# Altium PCB Levitador Magnetico.PcbDoc
Units mil, origin at the board's own origin, x right, y up, seen from the top; angles counter-clockwise.
Board outline 5905.51 x 5905.51 mil, 2 copper layers (Top Layer, Bottom Layer); 227 components, 115 nets, 620 pads, 44 vias.
Unrouted connection lines stored in the file: 297.
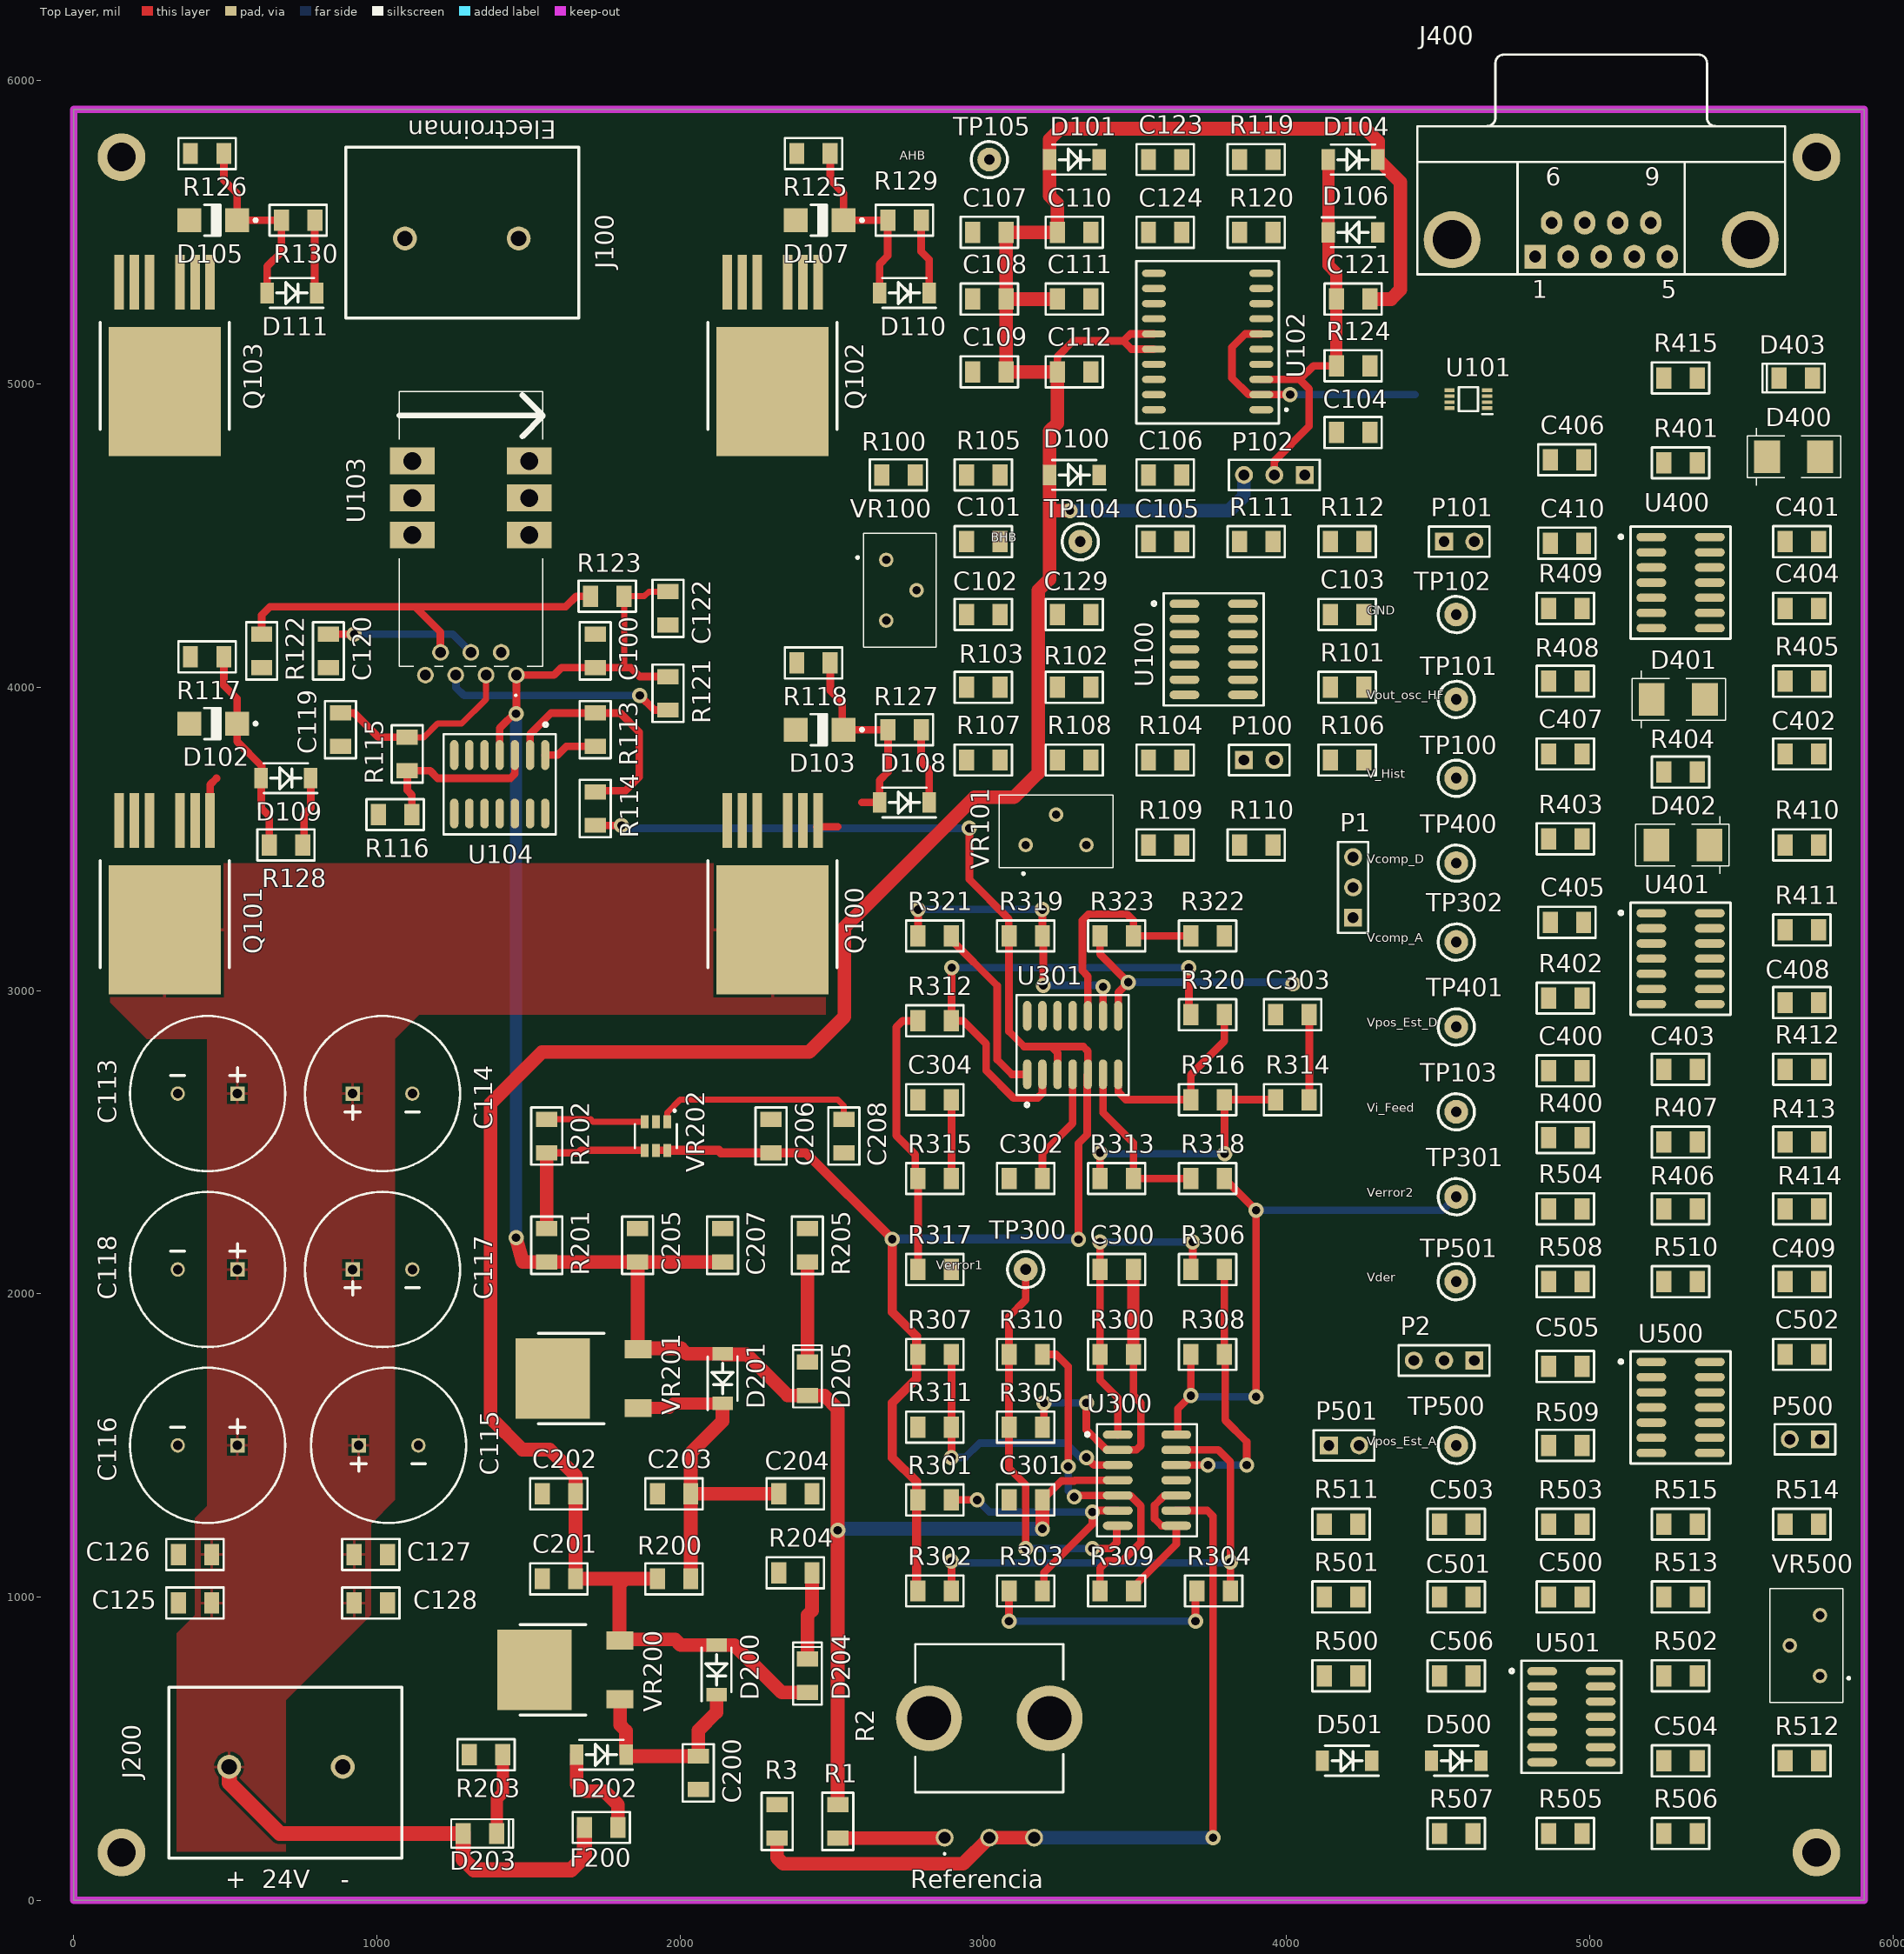
[diagram p0: Top Layer view]
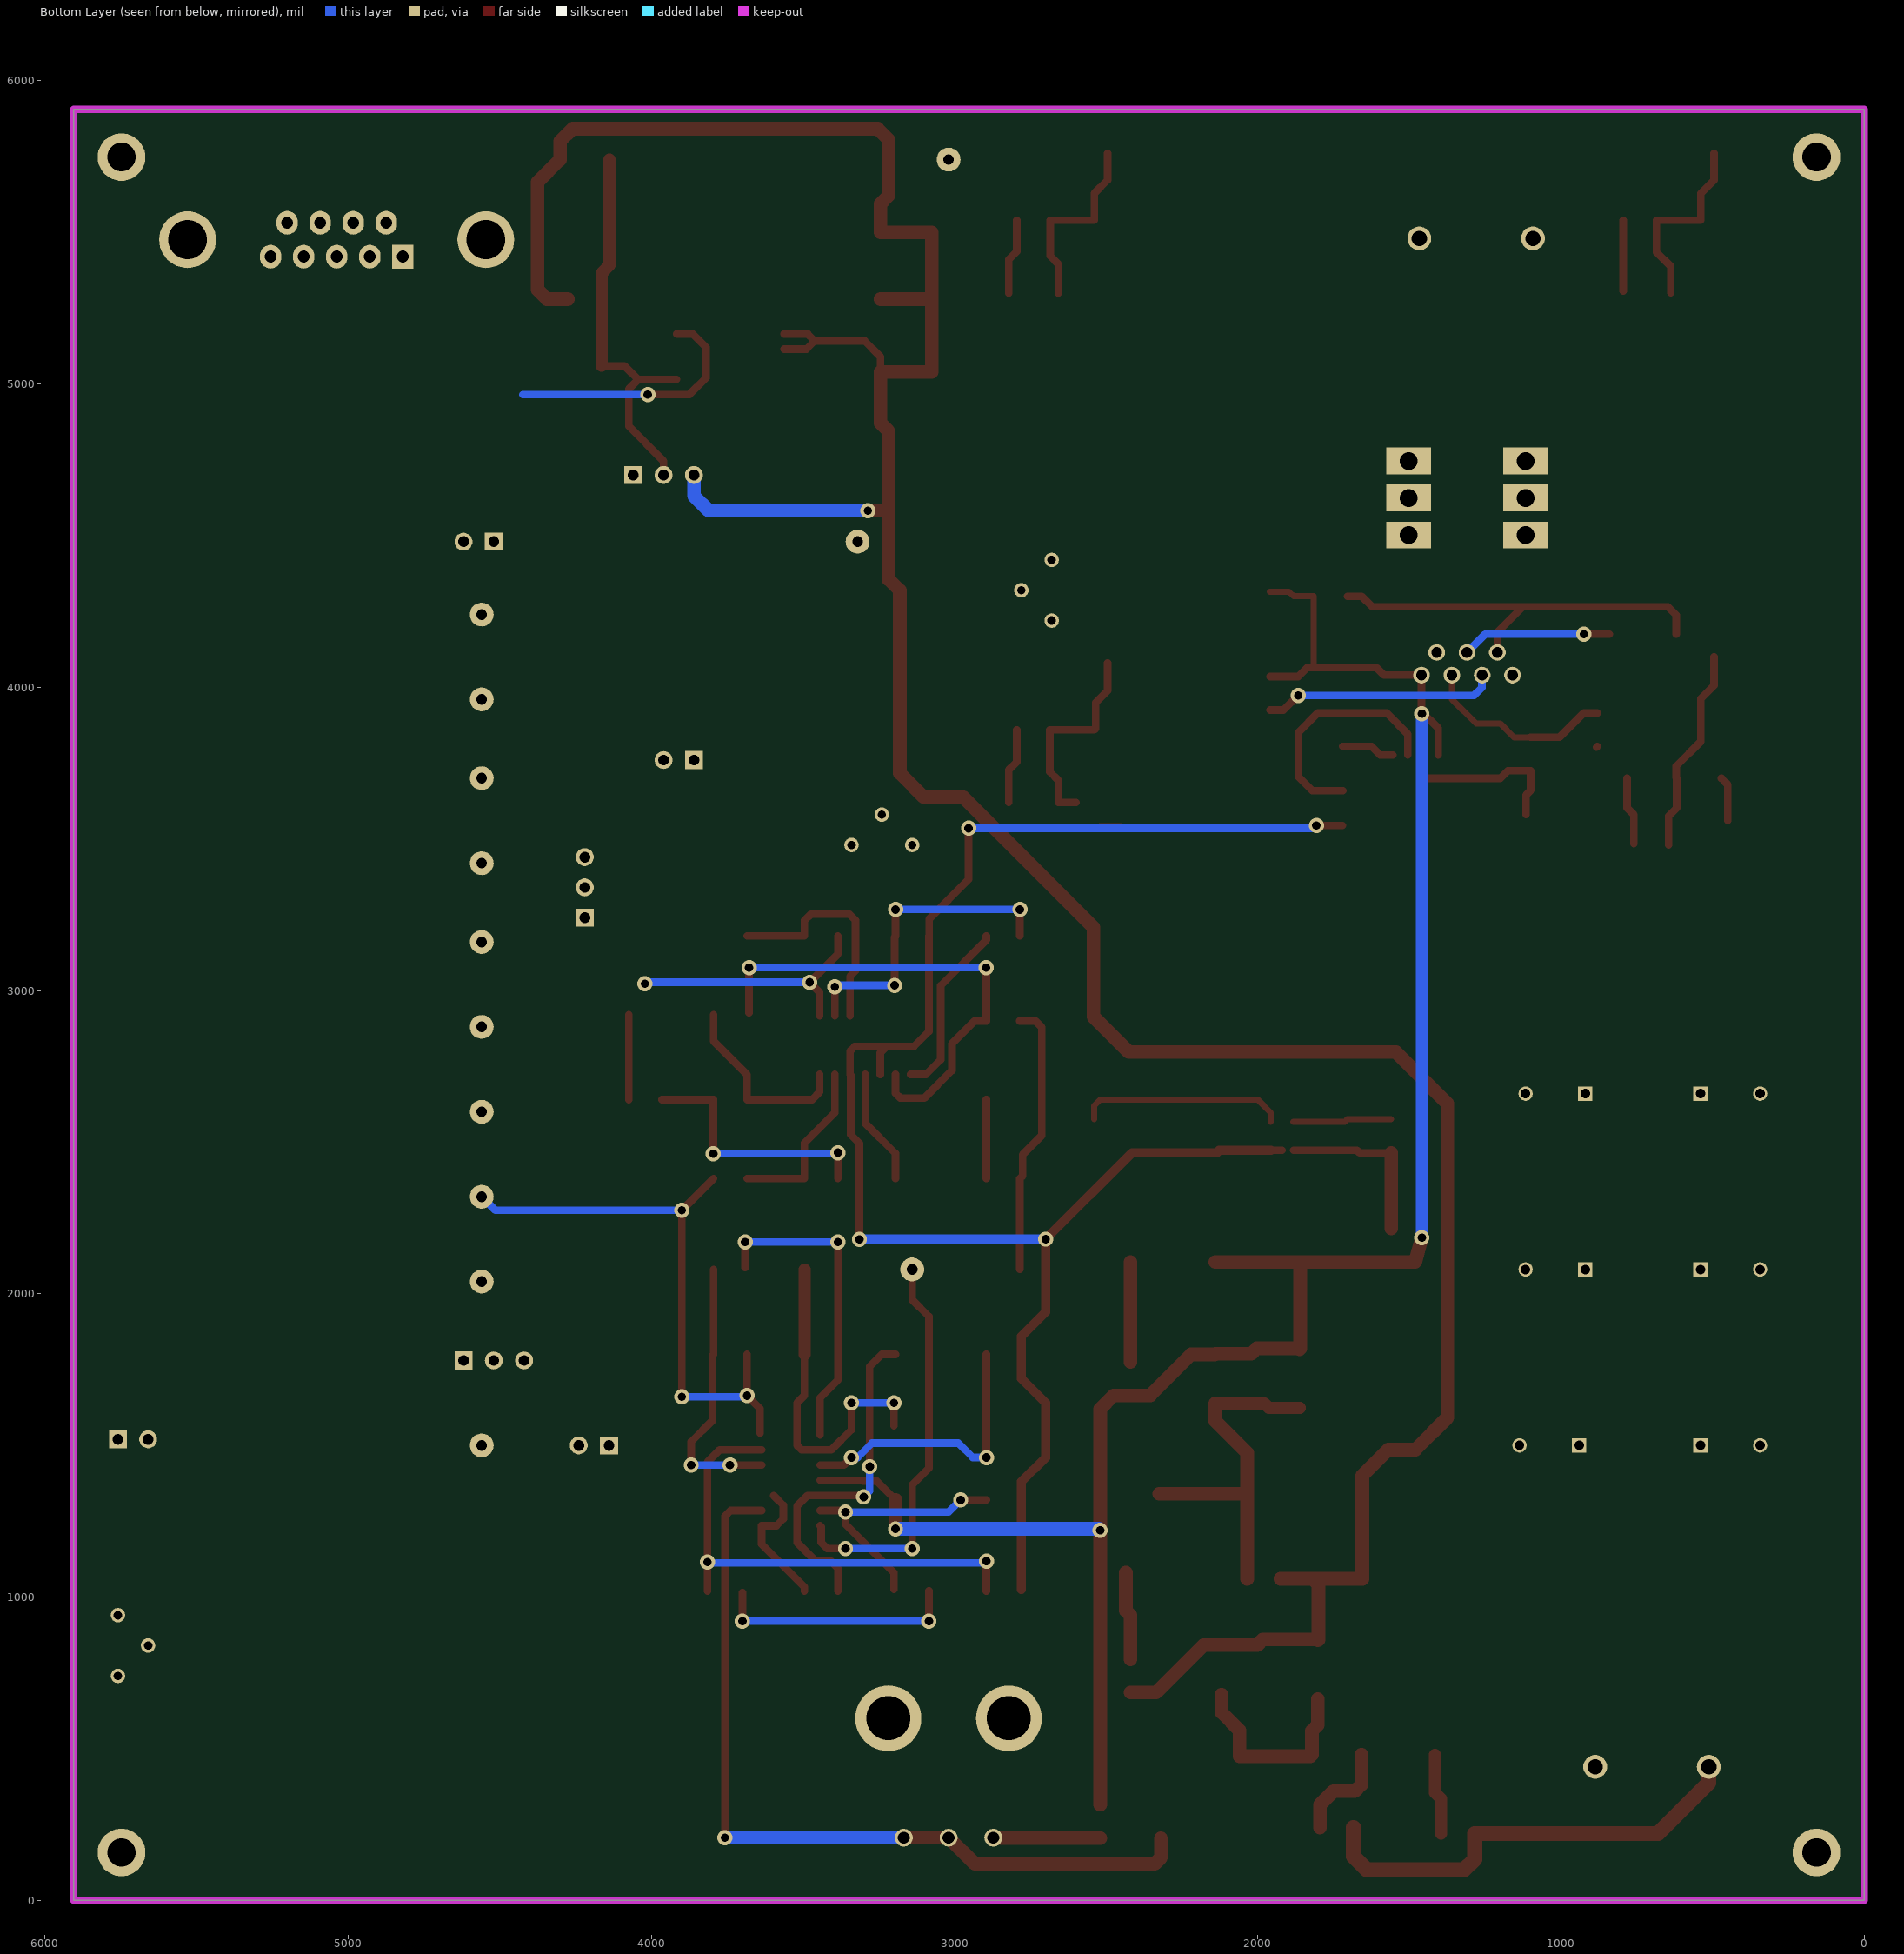
[diagram p1: Bottom Layer view, seen from below]

## Layer stack, top to bottom
Top Solder: solder mask 0.4, Solder Resist, Dk 3.5
Top Layer: signal copper 1.4
Dielectric 1: dielectric 12.6, FR-4, Dk 4.8
Bottom Layer: signal copper 1.4
Bottom Solder: solder mask 0.4, Solder Resist, Dk 3.5

## Board outline
0,0 5905.51,0 5905.51,5905.51 0,5905.51

## Design rules (kind name [scope] priority, off if disabled: settings)
Clearance [All] p1: gap=10
PolygonConnect [All] p1: connectstyle=Relief reliefconductorwidth=10 reliefentries=4 polygonreliefangle="90 Angle" airgapwidth=10
RoutingVias [All] p1: holewidth=28 width=50 viastyle="Through Hole" minholewidth=28 minwidth=50 maxholewidth=28 maxwidth=50
SolderMaskExpansion [All] p1: expansion=4
Width [All] p1: maxlimit=200 minlimit=10 preferedwidth=10
30 further rules are at their usual default settings.

## Classes and differential pairs
component class U_Signals2uC: C400 C401 C402 C403 C404 C405 C406 C407 C408 C409 C410 D400 D401 D402 D403 J400 R400 R401 R402 R403 R404 R405 R406 R407 R408 R409 R410 R411 R412 R413 R414 R415 TP400 TP401 U400 U401
component class "U_Puente H": C100 C113 C114 C115 C116 C117 C118 C119 C120 C122 C125 C126 C127 C128 D102 D103 D105 D107 D108 D109 D110 D111 J100 Q100 Q101 Q102 Q103 R113 R114 R115 R116 R117 R118 R121 R122 R123 R125 R126 R127 R128 R129 R130 U103 U104
component class U_Fuentes: C200 C201 C202 C203 C204 C205 C206 C207 C208 D200 D201 D202 D203 D204 D205 F200 J200 R200 R201 R202 R203 R204 R205 VR200 VR201 VR202
component class U_Estimador: C500 C501 C502 C503 C504 C505 C506 D500 D501 P500 P501 R500 R501 R502 R503 R504 R505 R506 R507 R508 R509 R510 R511 R512 R513 R514 R515 TP500 TP501 U500 U501 VR500
component class "U_Controlador de corriente  V3": C101 C102 C103 C104 C105 C106 C107 C108 C109 C110 C111 C112 C121 C123 C124 C129 D100 D101 D104 D106 P100 P101 P102 R100 R101 R102 R103 R104 R105 R106 R107 R108 R109 R110 R111 R112 R119 R120 R124 TP100 TP101 TP102 TP103 TP104 TP105 U100 U101 U102 VR100 VR101
component class U_Compensador: C300 C301 C302 C303 C304 R300 R301 R302 R303 R304 R305 R306 R307 R308 R309 R310 R311 R312 R313 R314 R315 R316 R317 R318 R319 R320 R321 R322 R323 TP300 TP301 TP302 U300 U301
component class Principal: P1 P2 R1 R2 R3

## Components (designator, comment, footprint, x,y, rotation, side; value= is the part's Value field where it differs from the comment)
C100 "Capacitor" C1206 1720,4120 r90 top
C101 "Capacitor" C1206 3000,4480 r180 top
C102 "Capacitor" C1206 3000,4240 r180 top
C103 "Capacitor" C1206 4200,4240 r180 top
C104 "Capacitor" C1206 4220,4840 r0 top
C105 "Capacitor" C1206 3600,4480 r0 top
C106 "Capacitor" C1206 3600,4700 r0 top
C107 "Capacitor" C1206 3020,5500 r0 top
C108 "Capacitor" C1206 3020,5280 r0 top
C109 "Capacitor" C1206 3020,5040 r0 top
C110 "Capacitor" C1206 3300,5500 r180 top
C111 "Capacitor" C1206 3300,5280 r180 top
C112 "Capacitor" C1206 3300,5040 r180 top
C113 "EKY-350ELL102MK25S" CAPPRD500W60D1300H2650 540,2660 r180 top
C114 "EKY-350ELL102MK25S" CAPPRD500W60D1300H2650 920,2660 r0 top
C115 "EKY-350ELL102MK25S" CAPPRD500W60D1300H2650 940,1500 r0 top
C116 "EKY-350ELL102MK25S" CAPPRD500W60D1300H2650 540,1500 r180 top
C117 "EKY-350ELL102MK25S" CAPPRD500W60D1300H2650 920,2080 r0 top
C118 "EKY-350ELL102MK25S" CAPPRD500W60D1300H2650 540,2080 r180 top
C119 "Capacitor" C1206 880,3860 r90 top
C120 "Capacitor" C1206 840,4120 r270 top
C121 "Capacitor" C1206 4220,5280 r0 top
C122 "Capacitor" C1206 1960,4260 r90 top
C123 "Capacitor" C1206 3600,5740 r0 top
C124 "Capacitor" C1206 3600,5500 r0 top
C125 "Capacitor" C1206 400,980 r0 top
C126 "Capacitor" C1206 400,1140 r0 top
C127 "Capacitor" C1206 980,1140 r180 top
C128 "Capacitor" C1206 980,980 r180 top
C129 "Capacitor" C1206 3300,4240 r0 top
C200 "Capacitor" C1206 2060,420 r90 top
C201 "Capacitor" C1206 1600,1060 r0 top
C202 "Capacitor" C1206 1600,1340 r0 top
C203 "Capacitor" C1206 1980,1340 r0 top
C204 "Capacitor" C1206 2380,1340 r180 top
C205 "Capacitor" C1206 1860,2160 r270 top
C206 "Capacitor" C1206 2300,2520 r270 top
C207 "Capacitor" C1206 2140,2160 r270 top
C208 "Capacitor" C1206 2540,2520 r90 top
C300 "Capacitor" C1206 3440,2080 r0 top
C301 "Capacitor" C1206 3140,1320 r0 top
C302 "Capacitor" C1206 3140,2380 r0 top
C303 "Capacitor" C1206 4020,2920 r180 top
C304 "Capacitor" C1206 2840,2640 r0 top
C400 "Capacitor" C1206 4920,2735 r180 top
C401 "Capacitor" C1206 5700,4480 r180 top
C402 "Capacitor" C1206 5700,3780 r0 top
C403 "Capacitor" C1206 5300,2740 r180 top
C404 "Capacitor" C1206 5700,4260 r180 top
C405 "Capacitor" C1206 4925,3225 r180 top
C406 "Capacitor" C1206 4925,4750 r180 top
C407 "Capacitor" C1206 4920,3780 r0 top
C408 "Capacitor" C1206 5700,2960 r180 top
C409 "Capacitor" C1206 5700,2040 r0 top
C410 "Capacitor" C1206 4925,4475 r180 top
C500 "Capacitor" C1206 4920,1000 r0 top
C501 "Capacitor" C1206 4560,1000 r180 top
C502 "Capacitor" C1206 5700,1800 r180 top
C503 "Capacitor" C1206 4560,1240 r180 top
C504 "Capacitor" C1206 5300,460 r180 top
C505 "Capacitor" C1206 4920,1760 r180 top
C506 "Capacitor" C1206 4560,740 r180 top
D100 "RSX205LAM30TR" SODFL4725X105N 3300,4700 r180 top
D101 "RSX205LAM30TR" SODFL4725X105N 3300,5740 r180 top
D102 "SMAJ15A" ONSC-SMA-2-403D-02_F_V 460,3880 r180 top
D103 "SMAJ15A" ONSC-SMA-2-403D-02_F_V 2460,3860 r180 top
D104 "RSX205LAM30TR" SODFL4725X105N 4220,5740 r180 top
D105 "SMAJ15A" ONSC-SMA-2-403D-02_F_V 460,5540 r180 top
D106 "RSX205LAM30TR" SODFL4725X105N 4220,5500 r0 top
D107 "SMAJ15A" ONSC-SMA-2-403D-02_F_V 2460,5540 r180 top
D108 "RSX205LAM30TR" SODFL4725X105N 2740,3620 r180 top
D109 "RSX205LAM30TR" SODFL4725X105N 700,3700 r180 top
D110 "RSX205LAM30TR" SODFL4725X105N 2740,5300 r180 top
D111 "RSX205LAM30TR" SODFL4725X105N 720,5300 r180 top
D200 "RSX205LAM30TR" SODFL4725X105N 2120,760 r90 top
D201 "RSX205LAM30TR" SODFL4725X105N 2140,1720 r90 top
D202 "RSX205LAM30TR" SODFL4725X105N 1740,480 r180 top
D203 "LED" "LED 1206 RED" 1340,220 r0 top
D204 "LED" "LED 1206 RED" 2420,740 r90 top
D205 "LED" "LED 1206 RED" 2420,1720 r90 top
D400 "Diodo Zener" SMB 5760,4760 r0 top
D401 "Diodo Zener" SMB 5380,3960 r0 top
D402 "Diodo Zener" SMB 5220,3480 r180 top
D403 "LED" "LED 1206 RED" 5680,5020 r180 top
D500 "RSX205LAM30TR" SODFL4725X105N 4560,460 r180 top
D501 "RSX205LAM30TR" SODFL4725X105N 4200,460 r180 top
F200 "Fuse" R1206 1740,240 r0 top
J100 "Header 2" SMKDS5-2-9.5 1280,5480 r180 top
J200 "Header 2" SMKDS5-2-9.5 700,440 r0 top
J400 "DB9H" DB9H 4820,5420 r0 top
P1 "Header 3" HDR1X3 4220,3240 r90 top
P2 "Header 3" HDR1X3 4620,1780 r180 top
P100 "Header 2" HDR1X2 3860,3760 r0 top
P101 "Header 2" HDR1X2 4520,4480 r0 top
P102 "Header 3" HDR1X3 4060,4700 r180 top
P500 "Header 2" HDR1X2 5760,1520 r180 top
P501 "Header 2" HDR1X2 4140,1500 r0 top
Q100 "IPB160N04" TO263-7S 2305,3200 r180 top
Q101 "IPB160N04" TO263-7S 300,3200 r180 top
Q102 "IPB160N04" TO263-7S 2305,4975 r180 top
Q103 "IPB160N04" TO263-7S 300,4975 r180 top
R1 "374" R1206 2520,260 r90 top
R2 "Potenciometro" pote_5_pines_vertical 3020,600 r0 top
R3 "4k3" R1206 2320,260 r270 top
R100 "3k2" R1206 2720,4700 r180 top
R101 "10k" R1206 4200,4000 r180 top
R102 "10k" R1206 3300,4000 r180 top
R103 "1k" R1206 3000,4000 r180 top
R104 "500" R1206 3600,3760 r0 top
R105 "4k7" R1206 3000,4700 r180 top
R106 "15k" R1206 4200,3760 r0 top
R107 "10k" R1206 3000,3760 r0 top
R108 "10k" R1206 3300,3760 r0 top
R109 "500" R1206 3600,3480 r180 top
R110 "200k" R1206 3900,3480 r0 top
R111 "2k" R1206 3900,4480 r180 top
R112 "10k" R1206 4200,4480 r0 top
R113 "1k" R1206 1720,3860 r270 top
R114 "1k" R1206 1720,3600 r90 top
R115 "1k" R1206 1100,3780 r270 top
R116 "1k" R1206 1060,3580 r0 top
R117 "4k7" R1206 440,4100 r0 top
R118 "4k7" R1206 2440,4080 r180 top
R119 "200k" R1206 3900,5740 r180 top
R120 "200k" R1206 3900,5500 r180 top
R121 "100K" R1206 1960,3980 r90 top
R122 "1k" R1206 620,4120 r270 top
R123 "0R" R1206 1760,4300 r180 top
R124 "10k" R1206 4220,5060 r180 top
R125 "4k7" R1206 2440,5760 r180 top
R126 "4k7" R1206 440,5760 r0 top
R127 "0" R1206 2740,3860 r180 top
R128 "0" R1206 700,3480 r0 top
R129 "0" R1206 2740,5540 r180 top
R130 "0" R1206 740,5540 r0 top
R200 "0R" R1206 1980,1060 r180 top
R201 "0R" R1206 1560,2160 r270 top
R202 "4k7" R1206 1560,2520 r270 top
R203 "2.37K" R1206 1360,480 r0 top
R204 "1k" R1206 2380,1080 r180 top
R205 "300" R1206 2420,2160 r270 top
R300 "1M" R1206 3440,1800 r180 top
R301 "1k" R1206 2840,1320 r180 top
R302 "1k" R1206 2840,1020 r180 top
R303 "1k" R1206 3140,1020 r0 top
R304 "1k" R1206 3760,1020 r0 top
R305 "1k" R1206 3140,1560 r0 top
R306 "1k" R1206 3740,2080 r0 top
R307 "1k" R1206 2840,1800 r0 top
R308 "1k" R1206 3740,1800 r180 top
R309 "1k" R1206 3440,1020 r180 top
R310 "1k" R1206 3140,1800 r180 top
R311 "1k" R1206 2840,1560 r0 top
R312 "100k" R1206 2840,2900 r180 top
R313 "100k" R1206 3440,2380 r180 top
R314 "221" R1206 4020,2640 r180 top
R315 "221" R1206 2840,2380 r180 top
R316 "4k3" R1206 3740,2640 r0 top
R317 "4k3" R1206 2840,2080 r180 top
R318 "100k" R1206 3740,2380 r180 top
R319 "800k" R1206 3140,3180 r180 top
R320 "100k" R1206 3740,2920 r180 top
R321 "1k" R1206 2840,3180 r180 top
R322 "1k" R1206 3740,3180 r180 top
R323 "800k" R1206 3440,3180 r180 top
R400 "10k" R1206 4920,2515 r180 top
R401 "10k" R1206 5300,4740 r0 top
R402 "10k" R1206 4920,2975 r0 top
R403 "10k" R1206 4920,3500 r0 top
R404 "12k" R1206 5300,3720 r180 top
R405 "1k" R1206 5700,4020 r180 top
R406 "10k" R1206 5300,2280 r180 top
R407 "10k" R1206 5300,2500 r0 top
R408 "1k" R1206 4920,4020 r180 top
R409 "1k" R1206 4920,4260 r0 top
R410 "10k" R1206 5700,3480 r180 top
R411 "10k" R1206 5700,3200 r0 top
R412 "10k" R1206 5700,2740 r180 top
R413 "10k" R1206 5700,2500 r180 top
R414 "10k" R1206 5700,2280 r180 top
R415 "2.37K" R1206 5300,5020 r0 top
R500 "1.8M" R1206 4180,740 r0 top
R501 "3.56K" R1206 4180,1000 r180 top
R502 "100K" R1206 5300,740 r0 top
R503 "100K" R1206 4920,1240 r0 top
R504 "25K" R1206 4920,2280 r180 top
R505 "3.56K" R1206 4920,220 r0 top
R506 "100K" R1206 5300,220 r0 top
R507 "1.8M" R1206 4560,220 r0 top
R508 "8.9K" R1206 4920,2040 r180 top
R509 "15K" R1206 4920,1500 r0 top
R510 "10" R1206 5300,2040 r180 top
R511 "3.56K" R1206 4180,1240 r0 top
R512 "100K" R1206 5700,460 r0 top
R513 "1K" R1206 5300,1000 r0 top
R514 "293" R1206 5700,1240 r180 top
R515 "1k" R1206 5300,1240 r0 top
TP100 "V_Hist" "TESTPOINT KEYSTONE 5000 SILVER-RED" 4560,3700 r90 top
TP101 "Vout_osc_HF" "TESTPOINT KEYSTONE 5000 SILVER-RED" 4560,3960 r90 top
TP102 "GND" "TESTPOINT KEYSTONE 5000 SILVER-RED" 4560,4240 r90 top
TP103 "Vi_Feed" "TESTPOINT KEYSTONE 5000 SILVER-RED" 4560,2600 r90 top
TP104 "BHB" "TESTPOINT KEYSTONE 5000 SILVER-RED" 3320,4480 r90 top
TP105 "AHB" "TESTPOINT KEYSTONE 5000 SILVER-RED" 3020,5740 r90 top
TP300 "Verror1" "TESTPOINT KEYSTONE 5000 SILVER-RED" 3140,2080 r90 top
TP301 "Verror2" "TESTPOINT KEYSTONE 5000 SILVER-RED" 4560,2320 r90 top
TP302 "Vcomp_A" "TESTPOINT KEYSTONE 5000 SILVER-RED" 4560,3160 r90 top
TP400 "Vcomp_D" "TESTPOINT KEYSTONE 5000 SILVER-RED" 4560,3420 r90 top
TP401 "Vpos_Est_D" "TESTPOINT KEYSTONE 5000 SILVER-RED" 4560,2880 r90 top
TP500 "Vpos_Est_A" "TESTPOINT KEYSTONE 5000 SILVER-RED" 4560,1500 r90 top
TP501 "Vder" "TESTPOINT KEYSTONE 5000 SILVER-RED" 4560,2040 r90 top
U100 "MCP664" SOIC14 3760,4100 r0 top
U101 "SN74LVC3G06DCUT" SOP50P310X90-8N 4600,4950 r180 top
U102 "HIP4081A" SOIC20 3740,5140 r180 top
U103 "HO_15-NP-0000" HO15NP0000 1460,4040 r90 top
U104 "MCP664" SOIC14 1380,3680 r270 top
U300 "MCP664" SOIC14 3540,1360 r0 top
U301 "MCP664" SOIC14 3320,2820 r90 top
U400 "MCP664" SOIC14 5300,4320 r0 top
U401 "MCP664" SOIC14 5300,3080 r0 top
U500 "MCP664" SOIC14 5300,1600 r0 top
U501 "MCP664" SOIC14 4940,580 r0 top
VR100 "Trimmer (Thru-Hole)" 3299Y1203LF 2680,4420 r180 top
VR101 "Trimmer (Thru-Hole)" 3299Y1203LF 3140,3480 r270 top
VR200 "L78M12CDT-TR" TO252-AA 1520,760 r90 top
VR201 "L78M05CDT-TR" TO252-AA 1580,1720 r90 top
VR202 "MAX6071" SOT23-6 1920,2520 r270 top
VR500 "Trimmer (Thru-Hole)" 3299Y1203LF 5760,740 r0 top

## Footprints (in the part's own frame and the unit in brackets; to place one, negate y for a bottom-side part, rotate by r counter-clockwise, add the part's x,y. Pads: shape width x height; smd on the part's side, far side on the other; paste and mask are expansions set on the pad)
3299Y1203LF [mm]
  round 1.217 hole 0.71: 1(0,0) 2(-2.54,2.54) 3(0,5.08)
  silkscreen extent -4.19,-2.22 2.5,7.3, body extent -4.19,-2.22 1.91,7.3, height 11.65
C1206 [mil]
  rect 50x70 smd: 1(-55.12,0) 2(55.12,0)
  silkscreen extent -94,-51 94,51, body extent -63,-31 63,31, height 39
CAPPRD500W60D1300H2650 [mm]
  rect 1.2x1.2 hole 0.8: 1(0,0)
  round 1.2 hole 0.8: 2(5,0)
  silkscreen extent -4,-6.5 9,6.5, body extent -4,-6.5 9,6.5, height 26.5
DB9H [mm]
  rect 1.8x2 hole 1: 1(0,0)
  oval 1.8x2 hole 1: 2(2.77,0) 3(5.54,0) 4(8.31,0) 5(11.08,0) 6(1.385,2.84) 7(4.155,2.84) 8(6.925,2.84) 9(9.695,2.84)
  round 4.76 hole 3.26: 10(-6.955,1.42) 11(18.035,1.42)
  silkscreen extent -9.86,-1.48 20.94,16.92, body extent -9.84,-2.08 20.97,16.99, height 12.58
HDR1X2 [mm]
  rect 1.5x1.5 hole 0.9: 1(0,0)
  round 1.5 hole 0.9: 2(2.54,0)
  silkscreen extent -1.27,-1.27 3.81,1.27, body extent -1.27,-1.27 3.81,1.27, height 8.54
HDR1X3 [mm] "Connector; Header; 3 Position"
  rect 1.5x1.5 hole 0.9: 1(0,0)
  round 1.5 hole 0.9: 2(2.54,0) 3(5.08,0)
  silkscreen extent -1.27,-1.27 6.35,1.27, body extent -1.27,-1.27 6.35,1.27, height 8.54
HO15NP0000 [mm]
  round 1.4 hole 0.9: 1(0,0) 2(1.905,1.27) 3(0,2.54) 4(1.905,3.81) 5(0,5.08) 6(1.905,6.35) 7(0,7.62)
  rect 2.25x3.75 hole 1.5: 8(11.735,8.71) 9(14.835,8.71) 10(17.935,8.71) 11(17.935,-1.09) 12(14.835,-1.09) 13(11.735,-1.09)
  silkscreen extent -1.75,-2.19 23.75,9.81, body extent -0.18,-2.21 23.75,9.79, height 11.9
"LED 1206 RED" [mil] "Led SMD 1206"
  rect 50x70 smd: 1(-55.12,0) 2(55.12,0)
  silkscreen extent -95,-47 110,47, body extent -65,-31 69,32, height 20
ONSC-SMA-2-403D-02_F_V [mm] "Molded, 2-Leads, Body 4.32x2.6mm"
  rect 2x2 smd: 1(-2,0) 2(2,0)
  silkscreen extent -3.68,-1.3 0.74,1.3, body extent -2.16,-1.3 2.16,1.3, height 2.2
pote_5_pines_vertical [mm]
  round 1.5 hole 1: 1(-3.75,-10) 2(0,-10) 3(3.75,-10)
  round 5.52 hole 3.68: GND(-5.05,0) GND(5.05,0)
  silkscreen extent -6.2,-11.4 6.2,6.2, body extent -6.79,-10.4 6.79,6.2, height 25.1
R1206 [mil]
  rect 50x70 smd: 1(-55.12,0) 2(55.12,0)
  silkscreen extent -94,-51 94,51, body extent -63,-31 63,31, height 39
SMB [mil] "Para diodos como  4007, supresores, etc"
  rect 85x108 smd: 1(0,0) 2(-175,0)
  silkscreen extent -240,-95 68,95, body extent -194,-55 14,55, height 92
SMKDS5-2-9.5 [mm] "Phoenix Contact; Terminal block; 2way; 32A max; 9.52mm pitch; 135°"
  round 2 hole 1.3: 1(-4.76,0) 2(4.76,0)
  silkscreen extent -9.8,-7.65 9.73,6.65, body extent -10.08,-7.5 9.53,11, height 21.5
SODFL4725X105N [mm]
  rect 1.12x1.72 smd: 1(-2.075,0) 2(2.075,0)
  silkscreen extent -2.64,-1.25 1.85,1.25, body extent -2.35,-1.25 2.35,1.25, height 1.05
SOIC14 [mm]
  oval 2.5x0.7 smd: 1(-2.45,4.445) 2(-2.45,3.175) 3(-2.45,1.905) 4(-2.45,0.635) 5(-2.45,-0.635) 6(-2.45,-1.905) 7(-2.45,-3.175) 8(2.45,-3.175) 9(2.45,-1.905) 10(2.45,-0.635) 11(2.45,0.635) 12(2.45,1.905) 13(2.45,3.175) 14(2.45,4.445)
  silkscreen extent -5.16,-4.06 4.19,5.33, body extent -3.12,-3.68 3.07,4.95, height 1.7
SOIC20 [mm]
  oval 2x0.6 smd: 1(-4.5,5.715) 2(-4.5,4.445) 3(-4.5,3.175) 4(-4.5,1.905) 5(-4.5,0.635) 6(-4.5,-0.635) 7(-4.5,-1.905) 8(-4.5,-3.175) 9(-4.5,-4.445) 10(-4.5,-5.715) 11(4.5,-5.715) 12(4.5,-4.445) 13(4.5,-3.175) 14(4.5,-1.905) 15(4.5,-0.635) 16(4.5,0.635) 17(4.5,1.905) 18(4.5,3.175) 19(4.5,4.445) 20(4.5,5.715)
  silkscreen extent -6.68,-6.73 5.97,6.86, body extent -5.31,-6.5 5.31,6.5, height 2.66
SOP50P310X90-8N [mm]
  rect 0.85x0.3 smd: 1(-1.575,0.75) 2(-1.575,0.25) 3(-1.575,-0.25) 4(-1.575,-0.75) 5(1.575,-0.75) 6(1.575,-0.25) 7(1.575,0.25) 8(1.575,0.75)
  silkscreen extent -2,-1 0.8,1.25, body extent -1.55,-1 1.55,1, height 0.77
SOT23-6 [mm]
  rect 1.1x0.65 smd: 1(-1.2,0.95) 2(-1.2,0) 3(-1.2,-0.95) 4(1.2,-0.95) 5(1.2,0) 6(1.2,0.95)
  silkscreen extent -2.19,-1.75 1,1.75, body extent -1.5,-1.5 1.5,1.5, height 1.39
"TESTPOINT KEYSTONE 5000 SILVER-RED" [mm]
  round 2 hole 0.9: 1(0,0)
  silkscreen extent -1.52,-1.52 1.51,1.52, body extent -1.27,-1.27 1.27,1.27, height 4.89
TO252-AA [mil]
  rect 60x89 smd: 1(-97,-282) 3(97,-282)
  rect 265x245 smd: 2(0,0)
  silkscreen extent -149,-169 149,48, body extent -133,-291 133,107, height 156
TO263-7S [mm]
  rect 0.8x4.6 smd: 1(-3.81,-9.15) 2(-2.54,-9.15) 3(-1.27,-9.15) 5(1.27,-9.15) 6(2.54,-9.15) 7(3.81,-9.15)
  rect 9.4x10.8 smd: 4(0,0)
  silkscreen extent -5.41,-5.79 5.41,3.15, body extent -5.03,-10.97 4.97,4.7, height 4.78

## Part data
C113 C114 C115 C116 C117 C118: "Capacitor Polarised"
D100 D101 D104 D106 D108 D109 D110 D111 D200 D201 D202 D500 D501: "Schottky Diode"
D102 D103 D105 D107: library part 1SMA60CAT3G, "400 W Peak Power Zener Transient Voltage Suppressor, 2-Pin SMA, Pb-Free, Tape and Reel"
D203 D204 D205 D403: "Typical RED GaAs LED"
D400 D401 D402: "SZ1SMB5915BT3G"
J100 J200 P100 P101 P500 P501: "Header, 2-Pin"
P1 P2 P102: "Header, 3-Pin"
Q100 Q101 Q102 Q103: "HEXFET N-Channel Power MOSFET"
R1 R3 R100 R101 R102 R103 R104 R105 R106 R107 R108 R109 R110 R111 R112 R113 R114 R115 R116 R117 R118 R119 R120 R121 R122 R123 R124 R125 R126 R127 R128 R129 R130 R200 R201 R202 R203 R204 R205 R300 R301 R302 R303 R304 R305 R306 R307 R308 R309 R310 R311 R312 R313 R314 R315 R316 R317 R318 R319 R320 R321 R322 R323 R400 R401 R402 R403 R404 R405 R406 R407 R408 R409 R410 R411 R412 R413 R414 R415 R500 R501 R502 R503 R504 R505 R506 R507 R508 R509 R510 R511 R512 R513 R514 R515: library part R1206, "Resistor Chip; 1/8W;"
R2: "Vertical - 5 pines"
TP100 TP101 TP102 TP103 TP104 TP105 TP300 TP301 TP302 TP400 TP401 TP500 TP501: library part Testpoint
U101: "Schmitt-Trigger Inverter"
U102: "INTERSIL, 80V, 2.5A peak, High Frequency Full Bridge FET Driver"
U103: "Integrated Circuit"
VR100 VR101 VR500: library part Trimmer, "Res Cermet Trimmer 500K Ohm 10% 0.5W 25(Elec)Turn 2.19mm (9.53 X 4.83 X 11.55mm) Pin Thru-Hole Tube"
VR200 VR201: library part "Volt Reg", "Voltage Regulator"
VR202: library part MAX6070, "MAX6071AAUT25+T"

## Free pads (board coordinates)
  round 157.48 hole 94.49: 0(157.48,157.48) 0(157.48,5748.03) 0(5748.03,157.48) 0(5748.03,5748.03)

## Via types
v1: diameter 50, hole 28, Top Layer to Bottom Layer, 44 vias

## Nets (pads, with @x,y where several pads share a name; then routed paths per layer and width w, separated by ;. In a path a pad name is that pad's centre, name@x,y a point inside that pad or via, vN(x,y) a via of type N, cw(c..) or ccw(c..) an arc to the next point about the centre after c; other vN are vias at no path point)
+2.5V: C206.2 J400.2 R111.2 R114.1 R301.2 R302.2 R307.1 R319.2 R408.2 R412.1 R512.2 R514.1 U301.3 U301.5 U501.3 VR101.1 VR101.2 VR202.5 VR202.6 | length 5749.4
  Top Layer w25: R114.1@1720.88,3544 v1(1807,3544) ; VR202.5 VR202.6 ; v1(2954,3535) 2954,3366 3084,3236 3084,3180.88 R319.2 3084.88,2865.12 3135,2815 3224,2815 ; U301.3 3245,2794 3224,2815 ; v1(3314,2179) 3314,2496 3343,2525 U301.5@3343,2721.54 ; U301.5 3345,2800 3330,2815 3224,2815
  Top Layer w30: VR202.6 2127.24,2472.76 2135.12,2464.88 C206.2 2415.12,2464.88 v1(2700,2180) 2700,1940 2780,1860 2780,1720 2700,1640 2700,1460 2780,1380 R302.2@2780,1024.88
  Bottom Layer w25: v1(1807,3544) 1816,3535 v1(2954,3535)
  Bottom Layer w30: v1(2700,2180) 3313,2180 v1(3314,2179)
+2.6V: C101.2 C102.2 C120.1 R100.2 U103.4 VR100.2 | length 494.9
  Top Layer w25: C120.1 v1(924.88,4175.12)
  Bottom Layer w25: v1(924.88,4175.12) 1249.88,4175.12 U103.4
+5V: C100.1 C104.2 C122.2 C129.2 C205.2 C207.2 C301.2 C302.2 C405.1 C410.1 C505.1 C506.1 D201.2 D205.1 R1.2 R121.2 R123.1 R201.2 R500.2 U100.4 U101.8 U103.1 U104.4 U300.4 U301.4 U400.4 U401.4 U500.4 U501.4 VR100.1 VR201.3 | length 7425.9
  Top Layer w20: 1815.12,4065.76 R123.1 1882,4300 1897.12,4315.12 C122.2
  Top Layer w25: U104.4 1405,3865 1460,3920 U103.1 1584,4040 1608.88,4064.88 C100.1 1837.12,4064.88 1866.88,4035.12 R121.2 ; C301.2 3257.62,1382.5 3289.84,1382.5 3299.68,1382.5 3302.18,1385 U300.4 ; C302.2 3195.12,2462.12 3295,2562 U301.4
  Top Layer w45: v1(1459,2185) 1481.12,2104.88 R201.2 C205.2 ; VR201.3 1860,1819 C205.2 ; VR201.3@1865,1820 2003.39,1820 2021.69,1801.69 D201.2 ; C207.2 C205.2 ; D201.2@2141.69,1800 2220,1800 2355.12,1664.88 D205.1 2475.12,1664.88 2520,1620 v1(2520,1220) R1.2 ; v1(3195.12,1224.88) C301.2
  Bottom Layer w40: v1(1459,2185) v1(1459,3913)
  Bottom Layer w45: v1(2520,1220) 2524.88,1224.88 v1(3195.12,1224.88)
+12V: C107.2 C108.2 C109.2 C110.2 C111.2 C112.2 C121.2 C201.2 C202.2 D100.2 D101.2 D104.1 D200.2 D204.1 P102.3 R200.2 U102.15 U102.16 VR200.3 | length 10962.7
  Top Layer w25: C112.2 3244.88,5089.88 3297,5142 3462,5142 ; U102.16 3489,5115 3462,5142 ; U102.15 3485,5165 3462,5142
  Top Layer w45: VR200.3 1800,859 1800,1040 1820,1060 ; VR200.3@1805,860 1983.39,860 2001.69,841.69 D200.2 2178.31,841.69 2335.12,684.88 D204.1 ; R200.2 1820,1060 ; C111.2 C108.2 ; v1(3286,4582) 3218.31,4582 ; C121.2 4345,5280 4376,5311 4376,5665.69 D104.1 4301.69,5800.31 4260,5842 3254,5842 3218.31,5806.31 D101.2 3218.31,5620.69 3244.88,5594.12 C110.2 C107.2 C108.2 ; 1820,1060 C201.2 C202.2 1655.12,1400.88 1570,1486 1480,1486 1375,1591 1375,2627 1545,2797 2426,2797 2542,2913 2542,3208 2971,3637 3101,3637 3181,3717 3181,4319 3218.31,4356.31 3218.31,4582 ; C108.2 C109.2 C112.2 3244.88,4870.88 3218.31,4844.31 D100.2 3218.31,4582
  Bottom Layer w45: v1(3286,4582) 3811,4582 3860,4631 P102.3
+24V: C113.1 C114.1 C115.1 C116.1 C117.1 C118.1 C125.2 C126.2 C127.2 C128.2 D203.1 F200.1 J200.1 Q100.4 Q101.4 | length 1507.4
  Top Layer w50: J200.1 512.6,387.4 680,220 D203.1 1284.88,135.12 1320,100 1640,100 1684.88,144.88 F200.1
AHB: C123.2 C124.2 D101.1 TP105.1 U102.10
AHO: D108.1 R127.1 U102.11 | length 251
  Top Layer w25: R127.1 2795.12,3753.88 2821.69,3727.31 D108.1
AHS: C123.1 C124.1 D103.2 J100.2 Q101.2 Q101.3 Q101.5 Q101.6 Q101.7 Q103.4 R118.2 U102.12
AHS2: J100.1 U103.8 U103.9 U103.10
ALO: D110.1 R129.1 U102.13 | length 251
  Top Layer w25: R129.1 2795.12,5436.88 2821.69,5410.31 D110.1
BHB: C105.2 C106.2 D100.1 TP104.1 U102.1
BHI/ALI: U101.3 U101.7 U102.2 U102.6 | length 843.2
  Top Layer w25: U102.6 3864,5165 3820,5121 3820,5020 3875,4965 U102.2 v1(4012,4965)
  Bottom Layer w25: v1(4012,4965) 4424,4965
BHO: D109.1 R128.2 U102.20 | length 224.1
  Top Layer w25: R128.2@760,3484.88 760,3580 781.69,3601.69 D109.1
BHS: C105.1 C106.1 D102.2 Q100.2 Q100.3 Q100.5 Q100.6 Q100.7 Q102.4 R117.1 U102.19 U103.11 U103.12 U103.13
BLI/AHI: U101.5 U102.5 U102.7
BLO: D111.1 R130.2 U102.18 | length 233.4
  Top Layer w25: D111.1@795.12,5306.57 R130.2
DISABLE: C121.1 D104.2 D106.1 P102.2 R124.2 U102.3 | length 1331.4
  Top Layer w25: U102.3 4044,5015 4089,5060 R124.2 ; P102.2 3960,4746 4075,4861 4075,4984 4045,5014
  Top Layer w40: D104.2 D106.1 4138.31,5391.69 4164.88,5365.12 C121.1 R124.2
GND: C100.2 C101.1 C102.1 C103.2 C104.1 C107.1 C108.1 C109.1 C110.1 C111.1 C112.1 C113.2 C114.2 C115.2 C116.2 C117.2 C118.2 C119.1 C120.2 C122.1 C125.1 C126.1 C127.1 C128.1 C129.1 C200.1 C201.1 C202.1 C203.1 C204.1 C205.1 C206.1 C207.1 C208.1 C301.1 C302.1 C303.2 C304.1 C401.1 C404.2 C405.2 C407.1 C409.2 C410.2 C503.2 C504.1 C505.2 C506.2 D105.2 D106.2 D107.2 D400.1 D401.1 D402.1 J200.2 J400.3 J400.7 J400.10 J400.11 Q102.2 Q102.3 Q102.5 Q102.6 Q102.7 Q103.2 Q103.3 Q103.5 Q103.6 Q103.7 R3.1 R103.1 R105.1 R116.1 R119.2 R120.2 R122.2 R124.1 R125.2 R126.1 R203.1 R204.2 R205.1 R311.1 R322.1 R400.1 R406.1 R414.1 R415.1 R507.1 R515.1 TP102.1 U100.11 U101.4 U102.4 U102.14 U102.17 U103.2 U103.7 U104.11 U300.11 U301.11 U400.11 U401.11 U500.11 U501.11 VR200.2 VR201.2 VR202.2 | length 4.2
  Top Layer w25: C119.1 C119.1@883,3801.88
HDEL: R119.1 U102.8
LDEL: R120.1 U102.9
NetC103_1: C103.1 R101.1 R106.2 U100.9
NetC200_2: C200.2 D200.1 D202.1 VR200.1 | length 652.6
  Top Layer w45: VR200.1 1802,578 1821.69,558.31 D202.1 ; D202.1@1826.57,475.12 C200.2 2060,560 2120,620 D200.1
NetC203_2: C203.2 C204.2 D201.1 R200.1 VR201.1 | length 1195.9
  Top Layer w40: VR201.1 1963,1623 1978.31,1638.31 D201.1
  Top Layer w45: R200.1 C203.2 ; D201.1 2140,1580 2035.12,1475.12 C203.2 ; C204.2 C203.2
NetC208_2: C208.2 VR202.1 | length 683.6
  Top Layer w20: VR202.1 1957.4,2597.4 2000,2640 2520,2640 2540,2620 C208.2
NetC300_2: C300.2 R300.1 R305.2 U300.2 | length 1107.5
  Top Layer w25: R305.2@3200,1564.88 v1(3200,1640) ; v1(3340,1640) 3340,1551.8 3406.8,1485 U300.2 3505,1485 3520,1500 3520,1640 3495.12,1664.88 R300.1
  Top Layer w40: R300.1 C300.2
  Bottom Layer w25: v1(3200,1640) v1(3340,1640)
NetC303_1: C303.1 R314.1 | length 280
  Top Layer w25: R314.1 C303.1
NetC304_2: C304.2 R315.1 | length 260
  Top Layer w25: R315.1 C304.2
NetC400_2: C400.2 R400.2 R402.1 U401.2
NetC402_2: C402.2 R404.1 R405.2 U400.6
NetC403_2: C403.2 R406.2 R407.1 U401.6
NetC404_1: C404.1 R405.1
NetC406_2: C406.2 R409.1
NetC407_2: C407.2 R408.1 R409.2 U400.5
NetC408_2: C408.2 R411.1 R412.2 U401.9
NetC409_1: C409.1 R413.2 R414.2 U401.10
NetC500_2: C500.2 R502.2 R503.2 U501.13
NetC501_1: C501.1 P500.2 U500.6 U500.7
NetC501_2: C501.2 R508.2 R509.1
NetC502_1: C502.1 P500.1
NetC502_2: C502.2 R510.1
NetC503_1: C503.1 R509.2 U500.5
NetC504_2: C504.2 R506.2 R512.1 U501.12
NetD102_1: D102.1 D109.2 Q100.1 R117.2 R128.1 | length 829.5
  Top Layer w25: 450,3560.24 450,3679 471,3700 ; R117.2 495.12,4005.88 538.74,3962.26 D102.1 538.74,3821.26 620,3740 D109.2@620,3701.69 ; D109.2 618.31,3601.69 644.88,3575.12 R128.1
NetD103_1: D103.1 D108.2 Q101.1 R118.1 R127.2 | length 764.7
  Top Layer w25: 2450,3540.24 2520.24,3540.24 ; R118.1 2495.12,3988.88 2535,3949 2535,3863.74 D103.1 R127.2 2686,3858.88 2686,3721 2658.31,3693.31 D108.2 2600,3620
NetD105_1: D105.1 D111.2 Q102.1 R126.2 R130.1 | length 643.3
  Top Layer w25: R126.2 495.12,5671.88 538.74,5628.26 D105.1 R130.1 684.88,5434.88 638,5388 D111.2@638,5300.31
NetD107_1: D107.1 D110.2 Q103.1 R125.1 R129.2 | length 635.2
  Top Layer w25: R125.1 2495.12,5672.88 2538.74,5629.26 D107.1 R129.2 2684.88,5422.12 2658.31,5395.54 D110.2
NetD202_2: D202.2 F200.2 | length 337.8
  Top Layer w45: D202.2 1658.31,381.69 1680,360 1750.24,360 1795.12,315.12 F200.2
NetD203_2: D203.2 R203.2 | length 268.3
  Top Layer w40: D203.2 1395.12,335.12 1415.12,355.12 R203.2
NetD204_2: D204.2 R204.1 | length 291.1
  Top Layer w45: D204.2 2420,940 2435.12,955.12 R204.1
NetD205_2: D205.2 R205.2 | length 329.8
  Top Layer w45: D205.2 R205.2
NetD403_2: D403.2 R415.2
NetD500_2: D500.2 D501.1 U501.1
NetP501_1: P501.1 R511.1
NetR1_1: R1.1 R2.1 | length 350.9
  Top Layer w45: R1.1 R2.1@2870.94,204.88
NetR100_1: R100.1 R102.2 R105.2 U100.3
NetR103_2: R103.2 VR100.3
NetR104_2: R104.2 U100.6
NetR107_2: R107.2 R108.1 U100.2
NetR109_1: R109.1 R110.1 U100.5
NetR109_2: R109.2 VR101.3
NetR111_1: R111.1 R112.1 U100.10
NetR113_1: R113.1 R114.2 U104.2 | length 795.4
  Top Layer w25: U104.2 1505,3845 1575.12,3915.12 R113.1 1801.88,3915.12 1865,3852 1865,3704 1820,3659 R114.2@1720,3659
NetR115_2: R115.2 R116.2 U104.3 | length 584.1
  Top Layer w25: R116.2 1115.12,3644.88 1100,3660 R115.2 1175.12,3724.88 1200,3700 1440,3700 1455,3715 U104.3
NetR121_1: R121.1 U103.5 | length 769.7
  Top Layer w25: v1(1867,3973) 1915.12,3924.88 R121.1
  Bottom Layer w25: U103.5@1261,4039 1261,3999 1287,3973 v1(1867,3973)
NetR201_1: R201.1 R202.2 VR202.4 | length 575.6
  Top Layer w25: R202.2 1664.88,2464.88 1672.76,2472.76 VR202.4
  Top Layer w45: R201.1 R202.2
NetR202_1: R202.1 VR202.3 | length 325.9
  Top Layer w20: R202.1 1704.88,2575.12 1712.76,2567.24 VR202.3
NetR301_1: R301.1 R303.2 U300.6 | length 888.5
  Top Layer w25: R301.1 v1(2980,1320) ; R303.2@3200,1024.88 3200,1080 3360,1240 v1(3360,1280) 3365,1285 U300.6
  Bottom Layer w25: v1(2980,1320) 3020,1280 v1(3360,1280)
NetR302_1: R302.1 R304.2 U300.13 | length 1641.7
  Top Layer w25: R302.1 v1(2895.12,1118.12) ; U300.13 3775,1485 3815.12,1444.88 v1(3815.12,1115.12) R304.2
  Bottom Layer w25: v1(2895.12,1118.12) 2900.74,1112.5 3812.5,1112.5 v1(3815.12,1115.12)
NetR306_2: R306.2 R308.1 U300.12 | length 904.1
  Top Layer w25: U300.12 v1(3741,1435) ; R308.1 R306.2 ; R308.1@3798,1797.12 3798,1583 3869,1512 v1(3869,1435)
  Bottom Layer w25: v1(3741,1435) v1(3869,1435)
NetR307_2: R307.2 R311.2 U300.3 | length 950.4
  Top Layer w25: R307.2 R311.2 v1(2895.12,1460) 2895.12,1454.65 v1@2900,1449.76 ; v1(3340,1460) 3365,1435 U300.3
  Bottom Layer w25: v1(2895.12,1460) 2940,1460 2987.5,1507.5 3272.5,1507.5 3320,1460 v1(3340,1460)
NetR309_1: R309.1 U300.8 U300.10 | length 445.2
  Top Layer w25: R309.1 3495.12,1033.12 3636.46,1174.46 U300.8 3588,1235 3564.74,1258.26 3564.74,1302.28 U300.10@3597.46,1335
NetR309_2: R309.2 R310.1 U300.5 | length 1141.7
  Top Layer w25: R310.1 3240,1800 3280,1760 v1(3280,1430) ; v1(3300,1330) 3305,1335 U300.5 3485,1335 3520,1300 3520,1180 3460,1120 3409.76,1120 3384.88,1095.12 R309.2
  Bottom Layer w25: v1(3280,1430) 3280,1350 v1(3300,1330)
NetR312_1: R312.1 R320.2 U301.2 | length 1631.7
  Top Layer w25: v1(2896,3075) 2895.12,3074.12 R312.1 2933,2900 3009,2824 3009,2736 3100,2645 3179,2645 3195,2661 U301.2 ; R320.2@3678,2926.88 v1(3678,3075)
  Bottom Layer w25: v1(2896,3075) v1(3678,3075)
NetR312_2: R312.2 R315.2 R317.2 | length 909.4
  Top Layer w25: R317.2 R315.2 2776,2388.88 2776,2459 2713,2522 2713,2879 2734,2900 R312.2
NetR313_1: R313.1 R318.2 U301.6 | length 574.8
  Top Layer w25: U301.6 3395,2597 3495.12,2496.88 R313.1 R318.2
NetR313_2: R313.2 R314.2 R316.2 | length 844.1
  Top Layer w25: R313.2 v1(3384.88,2464.88) ; R316.2 R314.2 ; v1(3796,2462) R316.2@3796,2639.12
  Bottom Layer w25: v1(3384.88,2464.88) 3387.76,2462 v1(3796,2462)
NetR316_1: R316.1 R320.1 U301.7 | length 634.4
  Top Layer w25: U301.7 3445,2665 3470,2640 R316.1 3684.88,2722.88 3795.12,2833.12 R320.1
NetR317_1: R317.1 R321.1 U301.1 | length 589.6
  Top Layer w25: R321.1 2895.12,3166.88 3046,3016 3046,2772 3094.46,2723.54 U301.1
NetR319_1: R319.1 R321.2 U301.9 | length 1042.6
  Top Layer w25: R321.2 v1(2784.88,3267.12) ; R319.1@3194,3178.88 3198,3174.88 v1(3198,3017) ; R319.1@3194.88,3179.76 v1(3194.88,3267.12) ; U301.9 v1(3395,3012)
  Bottom Layer w25: v1(2784.88,3267.12) v1(3194.88,3267.12) ; v1(3198,3017) 3390,3017 v1(3395,3012)
NetR322_2: R322.2 R323.1 U301.10 | length 748.8
  Top Layer w25: U301.10 3345,3047 3327,3065 3327,3232 3347,3252 3474,3252 3495.12,3230.88 R323.1 R322.2
NetR401_1: R401.1 U400.1 U400.2
NetR403_2: R403.2 U401.3
NetR410_2: R410.2 U401.5
NetR501_1: R501.1 R505.1 R511.2 U501.2
NetR504_1: R504.1 R510.2 U500.2
NetR513_2: R513.2 U500.9 VR500.1
NetR514_2: R514.2 R515.2 U500.10
PRESENCIA_PLACA: D403.1 J400.8
STANDBY: R122.1 R123.2 U103.6 | length 1358.2
  Top Layer w25: R122.1 620,4238 647,4265 1126,4265 ; U103.6 1209,4116 1209,4182 1126,4265 ; R123.2 1657,4300 1622,4265 1126,4265
V_HALL: C119.2 R115.1 U103.3 | length 644.9
  Top Layer w20: R115.1 1155.12,3835.12 1200,3880 1280,3880 1360,3960 U103.3
  Top Layer w25: C119.2 924.88,3915.12 1004.88,3835.12 R115.1
V_HIST: P100.1 R110.2 TP100.1 U100.7
V_I*R: U500.3 U500.8 VR500.2 VR500.3
VCOMP_A: P1.1 R323.2 TP302.1 U301.8 | length 862.4
  Top Layer w25: R323.2 3384.88,3120.12 v1(3478,3027) 3445,2994 U301.8
  Bottom Layer w25: v1(3478,3027) 4018,3027 4022,3023 v1(4022,3022)
VCOMP_D: C400.1 P1.3 R402.2 TP400.1 U401.1
VCOMP_DAC: J400.1 R403.1
VDER: P501.2 R504.2 TP501.1 U500.1
VERROR1: R305.1 R310.2 TP300.1 U300.7 | length 1330.4
  Top Layer w25: v1(3140,1160) 3140,1369.76 3084.88,1424.88 R305.1 R310.2 3084.88,1924.88 3140,1980 TP300.1 ; v1(3360,1160) 3420,1160 3440,1180 3440,1231.46 U300.7
  Bottom Layer w25: v1(3140,1160) v1(3360,1160)
VERROR2: R308.2 R318.1 TP301.1 U300.14 | length 1936
  Top Layer w25: U300.14@3642,1540.54 3642,1621 v1(3684.88,1663.88) R308.2 ; R318.1 v1(3900,2275.12) v1(3900,1660)
  Bottom Layer w25: v1(3684.88,1663.88) 3688.76,1660 v1(3900,1660) ; v1(3900,2275.12) 4515.12,2275.12 TP301.1
"VI_ ERROR": R104.1 R108.2 U100.1
VI_FEED: C406.1 R107.1 R113.2 R508.1 R513.1 TP103.1 U104.1 U400.3 | length 176.8
  Top Layer w25: U104.1 1596.46,3776.46 1624.88,3804.88 R113.2
VI_FEED_ADC: C402.1 D401.2 J400.5 R404.2 U400.7
VI_FEED_VALOR_MEDIO_ADC: C401.2 D400.2 J400.4 R401.2
VI_REF: P1.2 R102.1
VIN_OSC_HF: P100.2 R106.1
VINTEGRADOR: C300.1 R300.2 R306.1 U300.1 | length 1051.1
  Top Layer w25: v1(3384.88,2170.88) C300.1 R300.2 3384.88,1715.12 3443.54,1656.46 U300.1 ; R306.1@3690.88,2086 v1(3690.88,2170.88)
  Bottom Layer w25: v1(3384.88,2170.88) v1(3690.88,2170.88)
VOUT_OSC_HF: P101.1 R101.2 R112.2 TP101.1 U100.8
VPOS_EST: P2.2 R303.1 R304.1 | length 810.2
  Top Layer w25: v1(3084.88,920) R303.1 ; v1(3700,920) R304.1@3700,1015.12
  Bottom Layer w25: v1(3084.88,920) v1(3700,920)
VPOS_EST_A: C500.1 P2.1 R503.1 TP500.1 U501.14
VPOS_EST_D: C403.1 P2.3 R407.2 TP401.1 U401.7
VPOS_EST_DAC: J400.6 R410.1
VPOS_REF: R2.2 R2.3 R3.2 R413.1 U300.9 | length 2735.6
  Top Layer w25: U300.9 3739,1285 3757.7,1266.3 v1(3757.7,206.3)
  Top Layer w45: R3.2 2320,140 2340,120 2933.7,120 R2.2 R2.3
  Bottom Layer w45: R2.3 v1(3757.7,206.3)
VPOS_REF_ADC: C408.1 D402.2 J400.9 R411.2 U401.8
VPST: D500.1 R505.2 R506.1 R507.2
VSW: P101.2 U101.1
VTST: D501.2 R500.1 R501.2 R502.1
pads on no net: P102.1 R2.GND U100.12 U100.13 U100.14 U101.2 U101.6 U104.5 U104.6 U104.7 U104.8 U104.9 U104.10 U104.12 U104.13 U104.14 U301.12 U301.13 U301.14 U400.8 U400.9 U400.10 U400.12 U400.13 U400.14 U401.12 U401.13 U401.14 U500.12 U500.13 U500.14 U501.5 U501.6 U501.7 U501.8 U501.9 U501.10

## Polygon pours and split planes (outlines as drawn)
+24V on Top Layer "Top Layer-+24V" (solid, remove dead copper, pour order 2): 340,160 700,160 700,660 740,700 980,940 980,1240 1060,1320 1060,2840 1140,2920 2480,2920 2480,3420 1300,3420 120,3420 120,2980 120,2960 140,2940 240,2840 440,2840 440,1300 400,1260 400,1240 400,940 340,880

## Keep-outs
Keep-Out Layer:
  the board outline again, w25

## Silkscreen, mask and mechanical layers (free items; w line width, h text height)
Top Overlay:
  text "Electroiman" at 1591,5868 h60 r180
  text "+" at 500,40 h60
  text "24V" at 620,40 h60
  text "-" at 880,40 h60
  text "Referencia" at 2760,40 h60

## Text inside footprints (layer, text, board x,y; h text height)
J400: Top Overlay "6" at 4854.84,5654.06 h59.06; Top Overlay "9" at 5182.01,5654.06 h59.06; Top Overlay "5" at 5236.54,5283.98 h59.06; Top Overlay "1" at 4810.16,5283.98 h59.06; Mechanical 29 "1" at 4810.16,5283.98 h59.06; Mechanical 29 "5" at 5236.54,5283.98 h59.06; Mechanical 29 "9" at 5182.01,5654.06 h59.06; Mechanical 29 "6" at 4854.84,5654.06 h59.06